# EAGLE board POFOCF_VD (EAGLE 7.7.0)
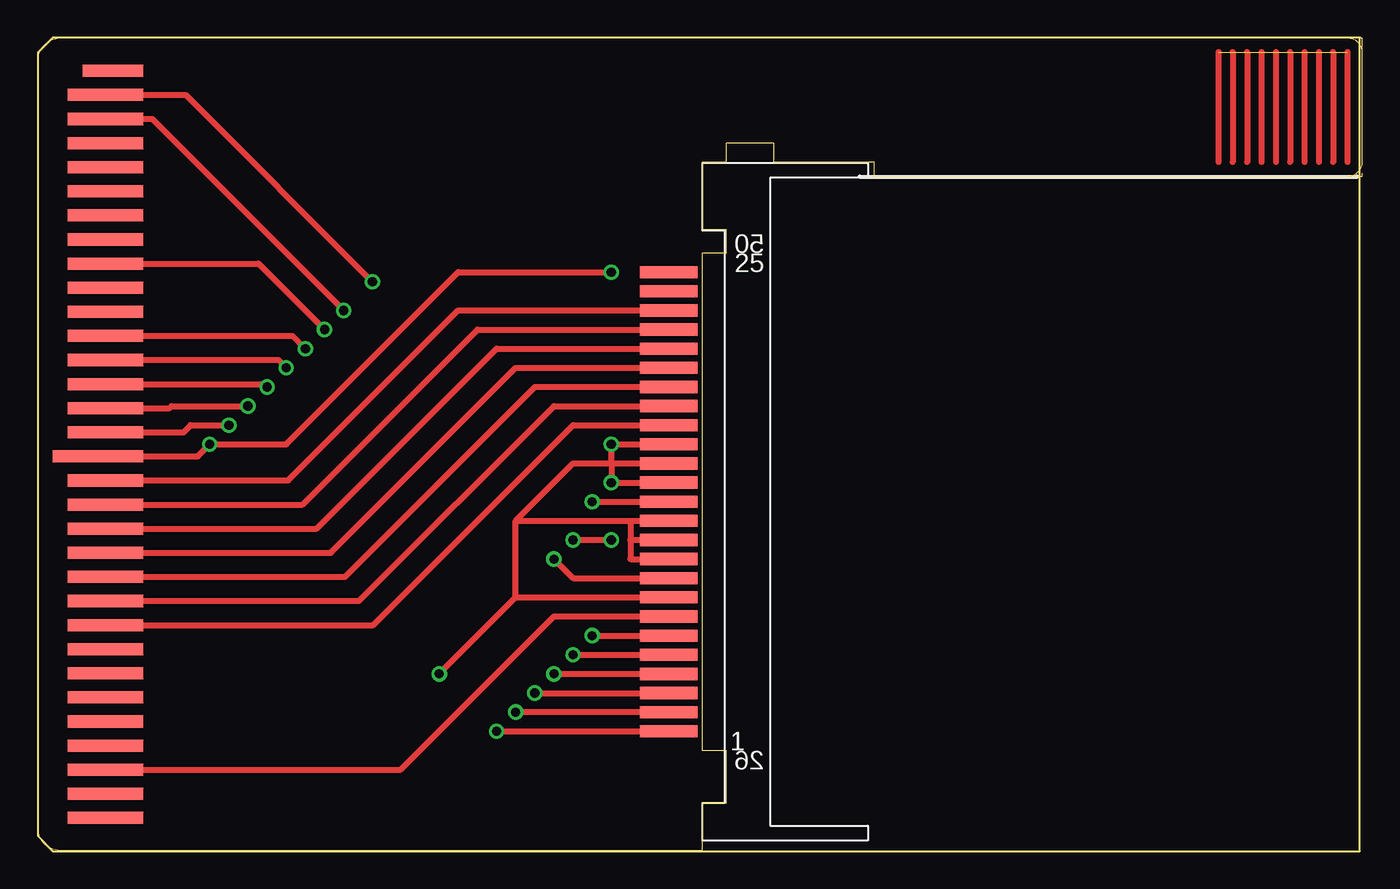
[diagram p0: board, top side]
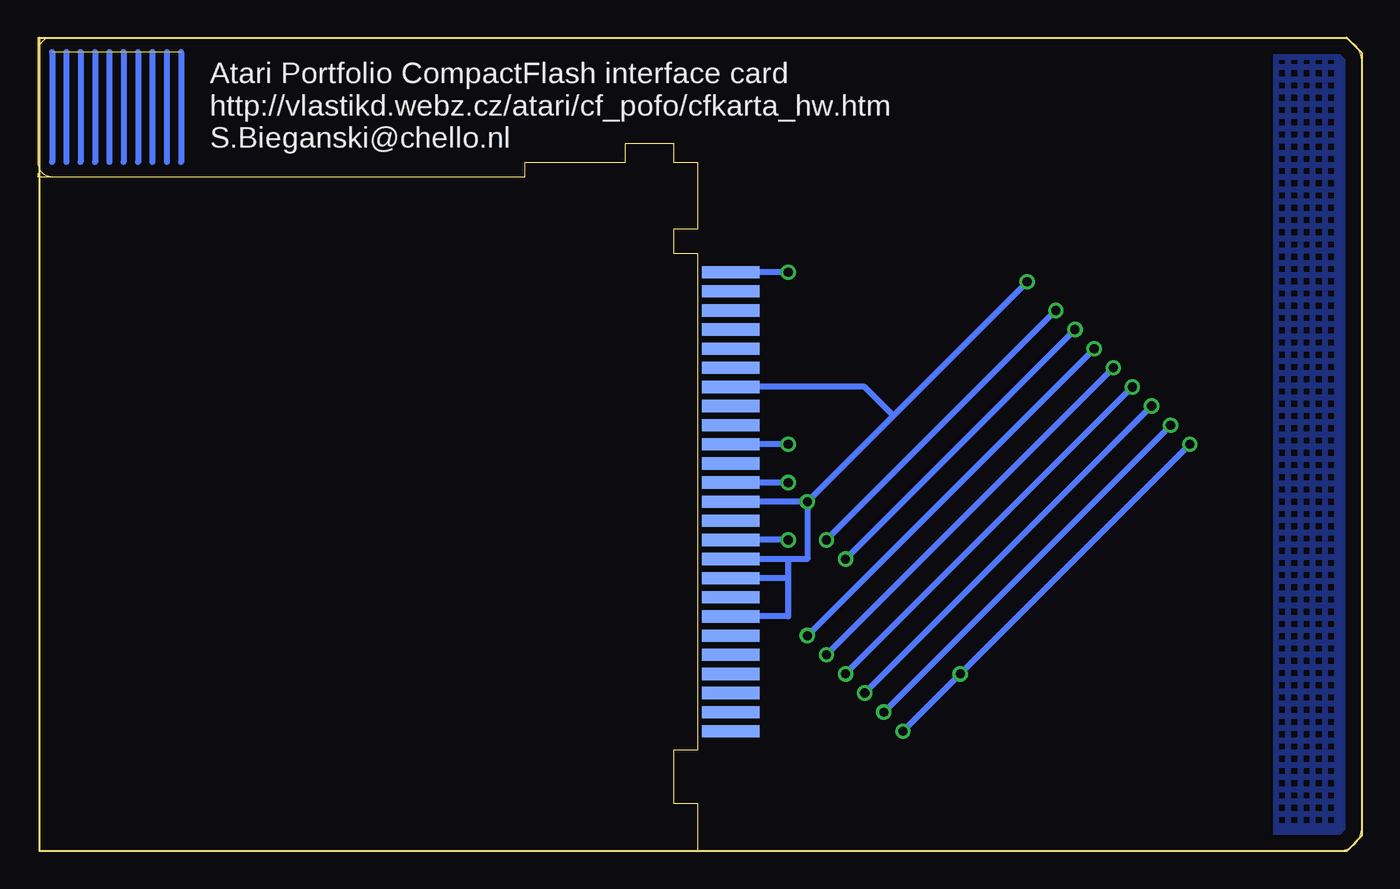
[diagram p1: board, bottom side, seen from below]

Size 87.95 x 54 mm. Coordinates in mm from the lower left corner, seen from the top.
Outline: 0,1.6 arc90 1.59,0.01 44.13,0.01 44.13,3.19 45.72,3.19 45.72,6.68 44.13,6.68 44.13,39.7 45.72,39.7 45.72,41.29 44.13,41.29 44.13,45.73 45.72,45.73 45.72,47 48.9,47 48.9,45.73 55.56,45.73 55.56,44.78 87.95,44.78 87.95,53.99 0.95,53.99 0,53.04 0,1.6
Outline: 0,1.6 0,0.97 0,1.6
Copper layers (1*16): Top 0.035mm / dielectric 1.5mm / Bottom 0.035mm
Design rules "default": minimum track width 10mil, minimum drill 24mil, track to track 8mil, track to pad 8mil, pad to pad 8mil, via to via 8mil, smd to smd 8mil, copper to edge 40mil, drill to drill 8mil, minimum pad ring 10mil, minimum via ring 8mil, stop-mask expansion 0mil, vias tented up to drill 0mil, thermal gap 10mil
Milling: 24 lines

## Footprints (pad centres in the part's own frame; a part is rotated, then mirrored left to right if it is on the bottom)
MEMCARD = smd 5 x 0.8: 1 0.7,-24.8; 2 0.7,-23.2; 3 0.7,-21.6; 4 0.7,-20; 5 0.7,-18.4; 6 0.7,-16.8; 7 0.7,-15.2; 8 0.7,-13.6; 9 0.7,-12; 10 0.7,-10.4; 11 0.7,-8.8; 12 0.7,-7.2; 13 0.7,-5.6; 14 0.7,-4; 15 0.7,-2.4; 17 0.7,0.8; 18 0.7,2.4; 19 0.7,4; 20 0.7,5.6; 21 0.7,7.2; 22 0.7,8.8; 23 0.7,10.4; 24 0.7,12; 25 0.7,13.6; 26 0.7,15.2; 27 0.7,16.8; 28 0.7,18.4; 29 0.7,20; 30 0.7,21.6; 31 0.7,23.2 | smd 6 x 0.8: 16 0.2,-0.8 | smd 4 x 0.8: 32 1.2,24.8
CF_SLOT1 = smd 3.81 x 0.813: 1 3.81,15.24; 2 3.81,13.97; 3 3.81,12.7; 4 3.81,11.43; 5 3.81,10.16; 6 3.81,8.89; 7 3.81,7.62; 8 3.81,6.35; 9 3.81,5.08; 10 3.81,3.81; 11 3.81,2.54; 12 3.81,1.27; 13 3.81,0; 14 3.81,-1.27; 15 3.81,-2.54; 16 3.81,-3.81; 17 3.81,-5.08; 18 3.81,-6.35; 19 3.81,-7.62; 20 3.81,-8.89; 21 3.81,-10.16; 22 3.81,-11.43; 23 3.81,-12.7; 24 3.81,-13.97; 25 3.81,-15.24 | smd 3.81 x 0.813 bottom: 26 3.81,15.24; 27 3.81,13.97; 28 3.81,12.7; 29 3.81,11.43; 30 3.81,10.16; 31 3.81,8.89; 32 3.81,7.62; 33 3.81,6.35; 34 3.81,5.08; 35 3.81,3.81; 36 3.81,2.54; 37 3.81,1.27; 38 3.81,0; 39 3.81,-1.27; 40 3.81,-2.54; 41 3.81,-3.81; 42 3.81,-5.08; 43 3.81,-6.35; 44 3.81,-7.62; 45 3.81,-8.89; 46 3.81,-10.16; 47 3.81,-11.43; 48 3.81,-12.7; 49 3.81,-13.97; 50 3.81,-15.24

## Placement (x,y rotation side)
U$1  [MEMCARD]  3.81,27 0 top
U$2  CF_SLOT11  [CF_SLOT1]  45.72,23.19 180 top

## Library data of the parts
U$1 U$2 = Atari_Portfolio

## Nets
N$1: U$1.17 U$2.2
N$2: U$1.18 U$2.3
N$3: U$1.19 U$2.4
N$4: U$1.20 U$2.5
N$5: U$1.21 U$2.6
N$6: U$1.24 U$2.9
N$7: U$1.11 U$2.19
N$8: U$1.10 U$2.18
N$9: U$1.9 U$2.17
N$10: U$1.12 U$2.20
N$11: U$1.13 U$2.21
N$12: U$1.14 U$2.22
N$13: U$1.15 U$2.23
N$14: U$1.16 U$2.1 U$2.8 U$2.10 U$2.11 U$2.12 U$2.14 U$2.15 U$2.16 U$2.39 U$2.41 U$2.50
N$15: U$1.3 U$2.7
N$16: U$1.30 U$2.36
N$17: U$1.31 U$2.13 U$2.32 U$2.34 U$2.35 U$2.38 U$2.44

## Tracks (layer width: path | path; a pad name or v marks a point on that pad's centre or on a via)
N$1  (via drill 0.61)
  Top 0.406: U$1.17 9.69,27.8 10.16,28.27 v12.7,28.27 | U$2.2 v31.75,9.22
  Bottom 0.406: v12.7,28.27 v31.75,9.22
N$2  (via drill 0.61)
  Top 0.406: v33.02,10.49 U$2.3 | U$1.18 8.75,29.4 8.89,29.54 v13.97,29.54
  Bottom 0.406: v13.97,29.54 v33.02,10.49
N$3  (via drill 0.61)
  Top 0.406: v34.29,11.76 U$2.4 | U$1.19 15.05,31 v15.24,30.81
  Bottom 0.406: v15.24,30.81 v34.29,11.76
N$4  (via drill 0.61)
  Top 0.406: v35.56,13.03 U$2.5 | U$1.20 15.99,32.6 v16.51,32.08
  Bottom 0.406: v16.51,32.08 v35.56,13.03
N$5  (via drill 0.61)
  Top 0.406: v36.83,14.3 U$2.6 | U$1.21 16.93,34.2 v17.78,33.35
  Bottom 0.406: v17.78,33.35 v36.83,14.3
N$6  (via drill 0.61)
  Top 0.406: U$2.9 35.56,18.11 v34.29,19.38 | U$1.24 14.67,39 v19.05,34.62
  Bottom 0.406: v19.05,34.62 v34.29,19.38
N$7
  Top 0.406: U$2.19 33.02,30.81 20.41,18.2 U$1.11
N$8
  Top 0.406: U$2.18 34.29,29.54 21.35,16.6 U$1.10
N$9
  Top 0.406: U$2.17 35.56,28.27 22.29,15 U$1.9
N$10
  Top 0.406: U$2.20 31.75,32.08 19.47,19.8 U$1.12
N$11
  Top 0.406: U$2.21 30.48,33.35 18.53,21.4 U$1.13
N$12
  Top 0.406: U$2.22 29.21,34.62 17.59,23 U$1.14
N$13
  Top 0.406: U$2.23 27.94,35.89 16.65,24.6 U$1.15
N$14  (via drill 0.61)
  Top 0.406: U$2.10 39.37,19.38 39.37,20.65 | 31.75,16.84 31.75,21.92 | v30.48,7.95 U$2.1 | 39.37,20.65 U$2.11 | 39.37,21.92 39.37,20.65 | 31.75,21.92 39.37,21.92 | 39.37,21.92 U$2.12 | 38.1,25.73 35.56,25.73 31.75,21.92 | 38.1,25.73 v38.1,24.46 U$2.39 | 31.75,16.84 U$2.8 | v26.67,11.76 31.75,16.84 | 38.1,25.73 U$2.15 | U$2.41 v38.1,27 38.1,25.73 | v38.1,38.43 27.94,38.43 16.51,27 v11.43,27 10.63,26.2 U$1.16
  Bottom 0.406: v30.48,7.95 v26.67,11.76 v11.43,27 | v38.1,24.46 U$2.39 | v38.1,27 U$2.41 | v38.1,38.43 U$2.50
N$15
  Top 0.406: U$2.7 34.29,15.57 24.12,5.4 U$1.3
N$16  (via drill 0.61)
  Top 0.406: v35.56,20.65 v38.1,20.65 | U$1.30 7.61,48.6 v20.32,35.89
  Bottom 0.406: v38.1,20.65 U$2.36 | v20.32,35.89 v35.56,20.65
N$17  (via drill 0.61)
  Top 0.406: v36.83,23.19 U$2.38 | U$1.31 9.82,50.2 v22.23,37.79
  Bottom 0.406: v22.23,37.79 31.11,28.9 | v36.83,23.19 36.83,19.38 38.1,19.38 | 38.1,19.38 U$2.35 | 38.1,19.38 38.1,18.11 | 38.1,18.11 U$2.34 | U$2.32 38.1,15.57 38.1,18.11 | 31.11,28.9 33.02,30.81 U$2.44 | 31.11,28.9 v36.83,23.19 | v36.83,23.19 U$2.38
S$1  (19 unrouted)
  Top 0.406: 87,53.04 87,45.73 | 86.04,53.04 86.04,45.73 | 85.09,53.04 85.09,45.73 | 84.14,53.04 84.14,45.73 | 83.19,53.04 83.19,45.73 | 82.23,53.04 82.23,45.73 | 81.28,53.04 81.28,45.73 | 80.33,53.04 80.33,45.73 | 79.38,53.04 79.38,45.73 | 78.42,53.04 78.42,45.73
  Bottom 0.406: 87,53.04 87,45.73 | 86.04,53.04 86.04,45.73 | 84.14,53.04 84.14,45.73 | 83.19,53.04 83.19,45.73 | 82.23,53.04 82.23,45.73 | 81.28,53.04 81.28,45.73 | 80.33,53.04 80.33,45.73 | 79.38,53.04 79.38,45.73 | 78.42,53.04 78.42,45.73 | 85.09,53.04 85.09,45.73 85.09,53.04
S$2
  pour Bottom (hatched): 1.59,53.99 5.71,53.99 5.71,0.01 1.59,0.01 arc-90 0,1.6 0,52.4 arc-90

## Text on the board
bNames: Atari Portfolio CompactFlash interface card / http://vlastikd.webz.cz/atari/cf_pofo/cfkarta_hw.htm / S.Bieganski@chello.nl